# Altium PCB EN-C200-OPT_RA0.PcbDoc
Units mil, origin at the board's own origin, x right, y up, seen from the top; angles counter-clockwise.
Board outline 2000 x 980 mil, 2 copper layers (Top Layer, Bottom Layer), stack 65.792 mil thick; 21 components, 19 nets, 57 pads, 137 vias.
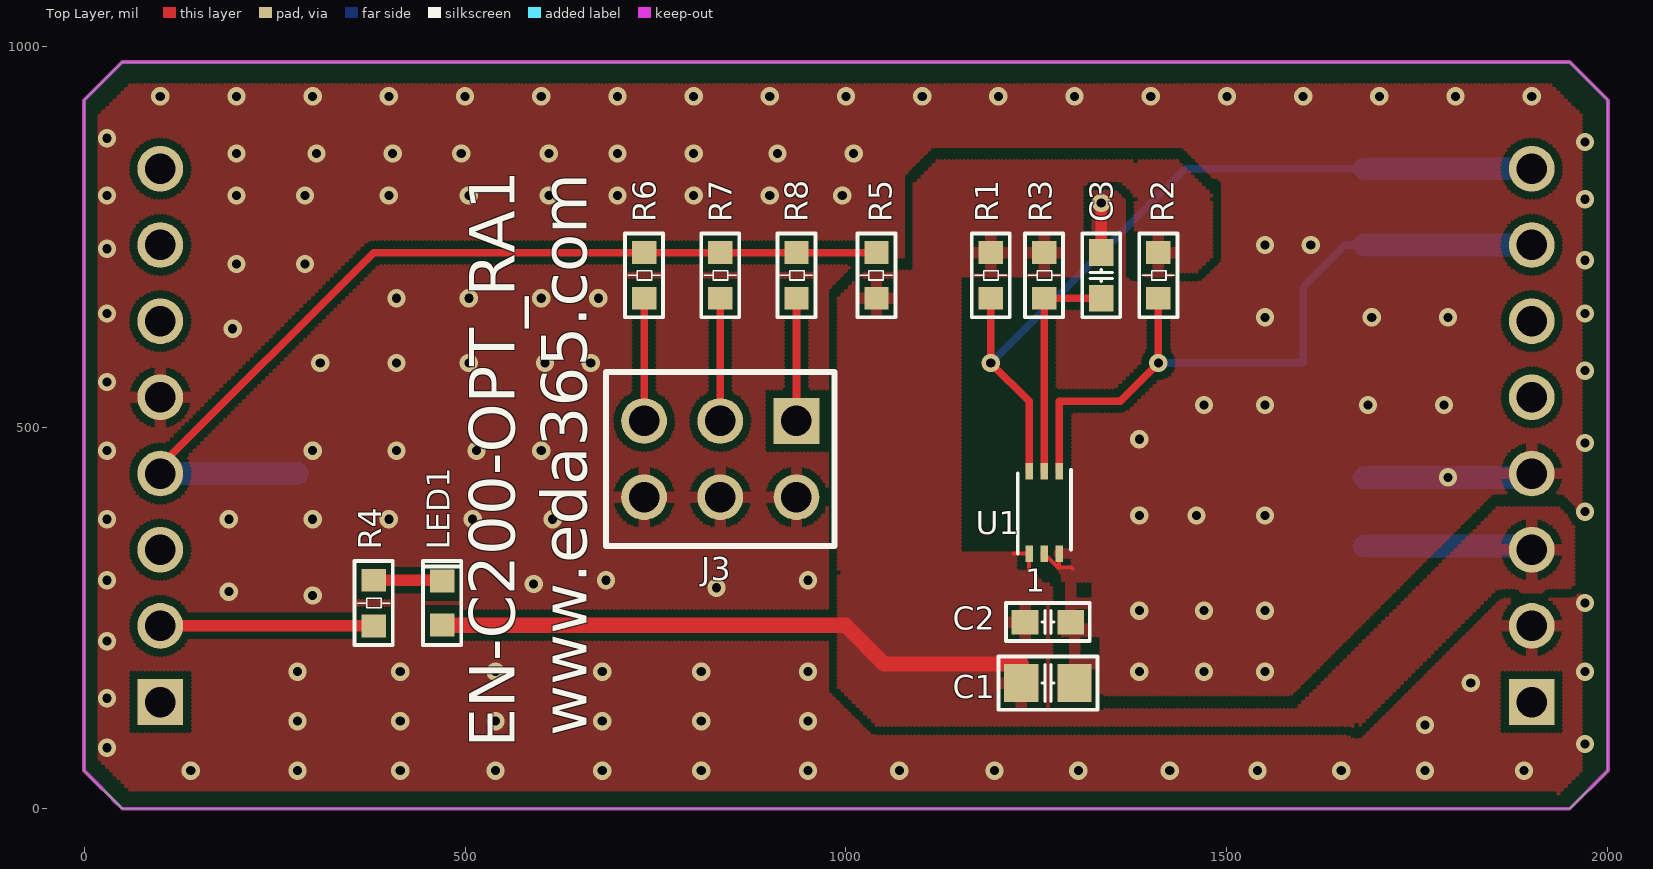
[diagram p0: Top Layer view]
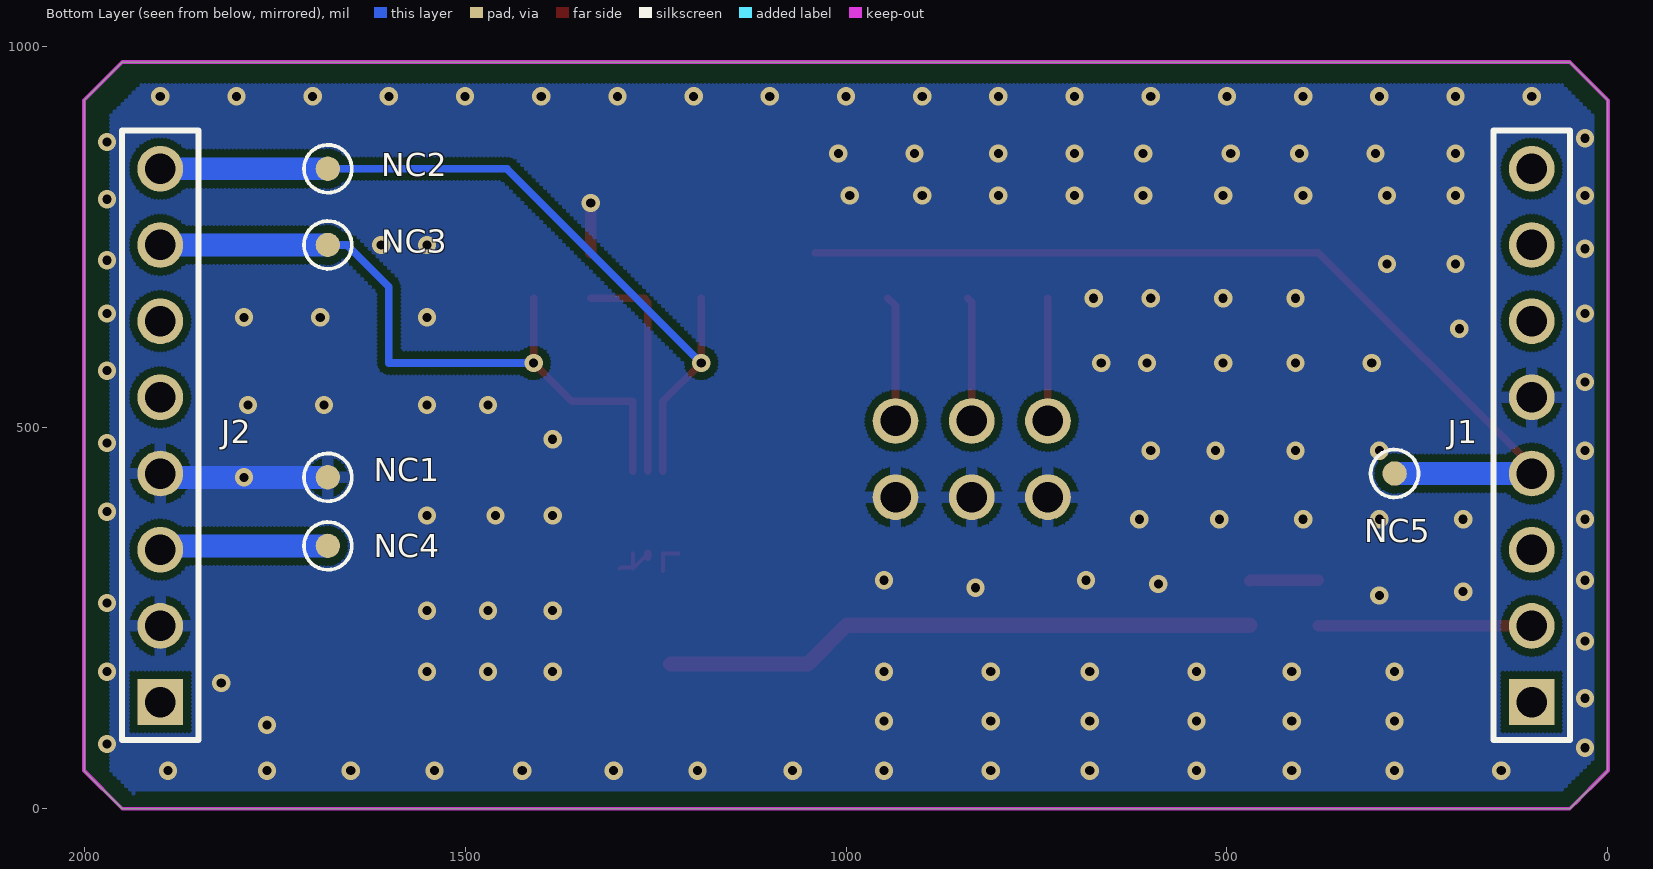
[diagram p1: Bottom Layer view, seen from below]

## Layer stack, top to bottom
Top Solder: solder mask 0.4, Solder Resist, Dk 3.5
Top Layer: signal copper 1.4
Dielectric1: core 62.992, FR-4, Dk 4.2
Bottom Layer: signal copper 1.4
Bottom Solder: solder mask 0.4, Solder Resist, Dk 3.5

## Board outline
50,0 0,50 0,930 50,980 1950,980 2000,930 2000,50 1950,0

## Design rules (kind name [scope] priority, off if disabled: settings)
Clearance Clearance_2 [(OnLayer('Keep-Out Layer'))] p1: gap=12 ignorepadtopadclearanceinfootprint=FALSE except(0: Arc-Hole Track-Hole SMDPad-Hole THPad-Hole Via-Hole Fill-Hole Poly-Hole Region-Hole Text-Hole)
Clearance Clearance_1 [inpoly] p2: gap=10 ignorepadtopadclearanceinfootprint=FALSE except(0: Arc-Hole Track-Hole SMDPad-Hole THPad-Hole Via-Hole Fill-Hole Poly-Hole Region-Hole Text-Hole)
Clearance [All] p3: gap=6 ignorepadtopadclearanceinfootprint=FALSE except(0: Arc-Hole Track-Hole SMDPad-Hole THPad-Hole Via-Hole Fill-Hole Poly-Hole Region-Hole Text-Hole)
MinimumSolderMaskSliver [All] p1: minsoldermaskwidth=4
PolygonConnect PolygonConnect_1 [isvia] p1: connectstyle=Direct reliefconductorwidth=10 reliefentries=4 polygonreliefangle="90 Angle" airgapwidth=10
PolygonConnect [All] p2: connectstyle=Relief reliefconductorwidth=15 reliefentries=4 polygonreliefangle="90 Angle" airgapwidth=10
RoutingVias [All] p1: holewidth=12 width=24 viastyle="Through Hole" minholewidth=12 minwidth=24 maxholewidth=12 maxwidth=24
SilkToSilkClearance [All] p1: silktosilkclearance=2
SilkToSolderMaskClearance SilkscreenOverComponentPads [IsPad] p1: minsilkscreentomaskgap=1 clearancetoexposedcopper=TRUE
SolderMaskExpansion [All] p1: expansion=2 istentingtop=FALSE
Width [All] p1: maxlimit=40 minlimit=4 preferedwidth=10
27 further rules are at their usual default settings.

## Components (designator, comment, footprint, x,y, rotation, side; value= is the part's Value field where it differs from the comment)
C1 "22uF" SC0805 1265,165 r0 top
C2 "100nF" SC0603 1265,245 r0 top
C3 "1uF" SC0603 1335,700 r90 top
J1 "SIP8-2.54mm Male" SIP-8P-100 100,490 r90 bottom locked
J2 "SIP8-2.54mm Male" SIP-8P-100 1900,490 r90 bottom locked
J3 "SIP2x3-2.54mm" SIP-2X3P-100 835,459 r0 top
LED1 "LTST-C191KGKT" HSD0603-LED 470,270 r90 top
NC1 "NC" TP32-SMD 1680,435 r180 bottom
NC2 "NC" TP32-SMD 1680,840 r90 bottom
NC3 "NC" TP32-SMD 1680,740 r90 bottom
NC4 "NC" TP32-SMD 1680,345 r90 bottom
NC5 "NC" TP32-SMD 280,440 r90 bottom
R1 "10K" SR0603 1190,700 r270 top
R2 "10K" SR0603 1410,700 r270 top
R3 "1K" SR0603 1260,700 r270 top
R4 "4.7K" SR0603 380,270 r270 top
R5 "10K" SR0603 1040,700 r90 top
R6 "100K" SR0603 735,700 r270 top
R7 "10K" SR0603 835,700 r270 top
R8 "1K" SR0603 935,700 r270 top
U1 "BH1750FVI" sop6-20-105 1260,389.13 r90 top

## Footprints (in the part's own frame and the unit in brackets; to place one, negate y for a bottom-side part, rotate by r counter-clockwise, add the part's x,y. Pads: shape width x height; smd on the part's side, far side on the other; paste and mask are expansions set on the pad)
HSD0603-LED [mil] "HSD0603-LED"
  rect 30x32 smd: 1(-29,0) 2(29,0)
  silkscreen extent -55,-25 55,25
SC0603 [mil] "SC0603"
  rect 35x32 smd: 1(-30,0) 2(30,0)
  silkscreen extent -55,-25 55,25
SC0805 [mil] "SC0805"
  rect 45x50 smd: 1(-35,0) 2(35,0)
  silkscreen extent -65,-35 65,35
SIP-2X3P-100 [mil] "SIP-2X3P-100"
  rect 60x60 / inner round 60 / far side round 60 hole 40: 1(100,50)
  round 60 hole 40: 2(100,-50) 3(0,50) 4(0,-50) 5(-100,50) 6(-100,-50)
  silkscreen extent -150,-114 150,114
SIP-8P-100 [mil] "SIP-8P-100"
  rect 60x60 hole 40: 1(-350,0)
  round 60 hole 40: 2(-250,0) 3(-150,0) 4(-50,0) 5(50,0) 6(150,0) 7(250,0) 8(350,0)
  silkscreen extent -400,-50 400,50
sop6-20-105 [mm] "16位输出型光强度传感器"
  rect 0.55x0.25 smd: 1(-1.375,0.5) 2(-1.375,0) 3(-1.375,-0.5) 4(1.375,-0.5) 5(1.375,0) 6(1.375,0.5)
  Top Layer pour cut-out: -0.867,0.881 -0.867,-0.897 1.038,-0.897 1.038,0.881
  silkscreen extent -1.37,-0.9 1.42,0.88
SR0603 [mil] "SR0603"
  rect 30x32 smd: 1(-30,0) 2(30,0)
  silkscreen extent -55,-25 55,25
TP32-SMD [mil] "TP32-SMD"
  round 32 smd: 1(0,0)
  silkscreen extent -31,-31 31,31

## Part data
C1 C2 C3: library part "CAP NP"
J1 J2: library part HEADER8
J3: library part CON2X3
LED1: library part LED
NC1 NC2 NC3 NC4 NC5: library part TP
R1 R2 R3 R4 R5 R6 R7 R8: library part RESISTOR
U1: "16 位数字输出型环境光强度传感器 ， I2C  BUS/-40 ℃ ～ +85 ℃"

## Via types
v1: diameter 24, hole 12, Top Layer to Bottom Layer, tented both sides, 137 vias

## Nets (pads, with @x,y where several pads share a name; then routed paths per layer and width w, separated by ;. In a path a pad name is that pad's centre, name@x,y a point inside that pad or via, vN(x,y) a via of type N, cw(c..) or ccw(c..) an arc to the next point about the centre after c; other vN are vias at no path point)
GND: C1.2 C2.2 C3.2 J1.5 J2.2 J2.4 J3.2 J3.4 J3.6 NC1.1 U1.2 U1.3 | length 364.2
  Top Layer w5: U1.2 1278.33,316.67 1279.68,316.67 ; 1279.68,315.32 1279.68,316.67 ; U1.3 1279.68,316.67 ; 1297.11,315 1295.43,316.67 1279.68,316.67
  Top Layer w10: U1.2@1260,330 U1.2
  Top Layer w15: C3.2 v1(1335,795)
  Bottom Layer w30: NC1.1 v1(1790,435) 1895,435 J2.4 ; J2.2@1895,235 J2.2
  other v1: 140,50 280,50 415,50 540,50 680,50 810,50 950,50 1070,50 1195,50 1305,50 1425,50 1540,50 1650,50 1760,50 1890,50 30,80 1970,85 1760,110 280,115 415,115 540,115 680,115 810,115 950,115 30,145 1820,165 280,180 415,180 540,180 680,180 810,180 950,180 1385,180 1470,180 1550,180 1970,180 30,220 1385,260 1470,260 1550,260 1970,270 300,280 190,285 830,290 590,295 30,300 685,300 950,300 30,380 190,380 300,380 400,380 510,380 615,380 1385,385 1460,385 1550,385 1970,390 30,470 300,470 410,470 515,470 600,470 1970,480 1385,485 1470,530 1550,530 1685,530 1785,530 30,560 1970,575 310,585 410,585 505,585 605,585 665,585 195,630 1550,645 1690,645 1790,645 30,650 1970,650 410,670 505,670 600,670 675,670 200,715 290,715 1970,720 30,735 1550,740 1610,740 1970,800 30,805 200,805 290,805 400,805 505,805 610,805 700,805 800,805 900,805 995,805 200,860 305,860 405,860 495,860 610,860 700,860 800,860 910,860 1010,860 1970,875 30,880 100,935 200,935 300,935 400,935 500,935 600,935 700,935 800,935 900,935 1000,935 1100,935 1200,935 1300,935 1400,935 1500,935 1600,935 1700,935 1800,935 1900,935
I2C_SCL_PC11: J2.8 NC2.1 R1.2 U1.6 | length 1063.2
  Top Layer w10: R1.2 v1(1190,585) 1240.31,534.69 U1.6
  Bottom Layer w10: v1(1190,585) 1335,730 1445,840 NC2.1
  Bottom Layer w30: NC2.1 J2.8
I2C_SDA_PC10: J2.7 NC3.1 R2.2 U1.4 | length 940.4
  Top Layer w10: U1.4 1279.68,443.58 1280,443.9 1280,535 1360,535 v1(1410,585) R2.2
  Bottom Layer w10: v1(1410,585) 1600,585 1600,685 1655,740 NC3.1
  Bottom Layer w30: NC3.1 J2.7
NetC3_1: C3.1 R3.2 U1.5 | length 298.8
  Top Layer w10: U1.5 1260,665 1265,670 C3.1
NetJ3_1: J3.1 R8.2 | length 165.1
  Top Layer w10: J3.1 935,660 R8.2@945,670
NetJ3_3: J3.3 R7.2 | length 163.1
  Top Layer w10: J3.3 835,665 R7.2@840,670
NetJ3_5: J3.5 R6.2 | length 161
  Top Layer w10: J3.5 R6.2
NetLED1_2: LED1.2 R4.1 | length 90.4
  Top Layer w15: R4.1 469,300 LED1.2
PA4: J1.1
PA5: J1.2 R4.2 | length 280
  Top Layer w15: J1.2 R4.2
PA6: J1.3
PA7: J1.4 NC5.1 R5.2 R6.1 R7.1 R8.1 | length 1246
  Top Layer w10: J1.4 100,450 380,730 R6.1 R7.1 R8.1 R5.2
  Bottom Layer w30: J1.4 NC5.1
PA11: J2.5
PA12: J2.6
PB5: J1.6
PB6: J1.7
PB7: J1.8
V3.3: C1.1 C2.1 J2.3 LED1.1 NC4.1 R1.1 R2.1 R3.1 R5.1 U1.1 | length 1046.8
  Top Layer w5: 1220,335 U1.1 1240.31,311.67
  Top Layer w20: LED1.1 999,241 1050,190 1230,190
  Bottom Layer w30: NC4.1 1895,345 J2.3
V5.0: J2.1

## Polygon pours and split planes (outlines as drawn)
GND on Top Layer "Top Layer-No Net" (hatched 90Degree grid 5 track 5, remove dead copper, pour order 1004): 20,910 60,950 1915,950 1925,950 1965,910 1965,60 1965,50 1935,20 1930,25 60,25 25,60 20,65 20,910
V3.3 on Top Layer "Top Layer-No Net" (hatched 90Degree grid 5 track 5, remove dead copper, pour order 1002): 1935,395 1955,375 1955,290 1950,285 1855,285 1670,100 1665,105 1040,105 990,155 990,670 1025,705 1090,705 1090,820 1120,850 1435,850 1475,810 1480,810 1480,720 1460,700 1380,700 1380,800 1360,820 1310,820 1310,700 1308.52,698.52 1307.03,700 1150,700 1150,340 1155,335 1245.31,335 1245.31,310.31 1245,310 1260,295 1270,295 1270,140 1280,130 1590,130 1855,395
GND on Bottom Layer "Top Layer-No Net" (hatched 90Degree grid 5 track 5, remove dead copper, pour order 1003): 20,910 60,950 1915,950 1925,950 1965,910 1965,60 1965,50 1935,20 1930,25 60,25 25,60 20,65 20,910

## Keep-outs
Keep-Out Layer:
  lines w5: 12.5,37.5 0,50 ; 37.5,12.5 50,0 ; 0,50 50,0 ; 0,50 0,930 50,980 1950,980 2000,930 2000,50 1950,0 50,0

## Silkscreen, mask and mechanical layers (free items; w line width, h text height)
Top Overlay:
  text "www.eda365.com" at 660,95 h60 r90
  text "EN-C200-OPT_RA1" at 565,80 h60 r90
Mechanical 1:
  lines w5: 12.5,37.5 0,50 ; 37.5,12.5 50,0 ; 0,50 0,930 50,980 1950,980 2000,930 2000,50 1950,0 50,0 ; 0,50 50,0
Mechanical 2:
  lines w5: 100,140 130,140 ; 1900,140 1930,140
  lines w6: 70,140 ccw(c100,140) 130,140 ccw(c100,140) 70,140 ; 1870,140 ccw(c1900,140) 1930,140 ccw(c1900,140) 1870,140
  lines w8: 50,90 150,90 150,890 50,890 50,90 ; 1850,90 1950,90 1950,890 1850,890 1850,90

## Text inside footprints (layer, text, board x,y; h text height)
U1: Top Overlay "1" at 1235.31,285 h30